# EAGLE board superslowclock_2x2_array (EAGLE 5.11)
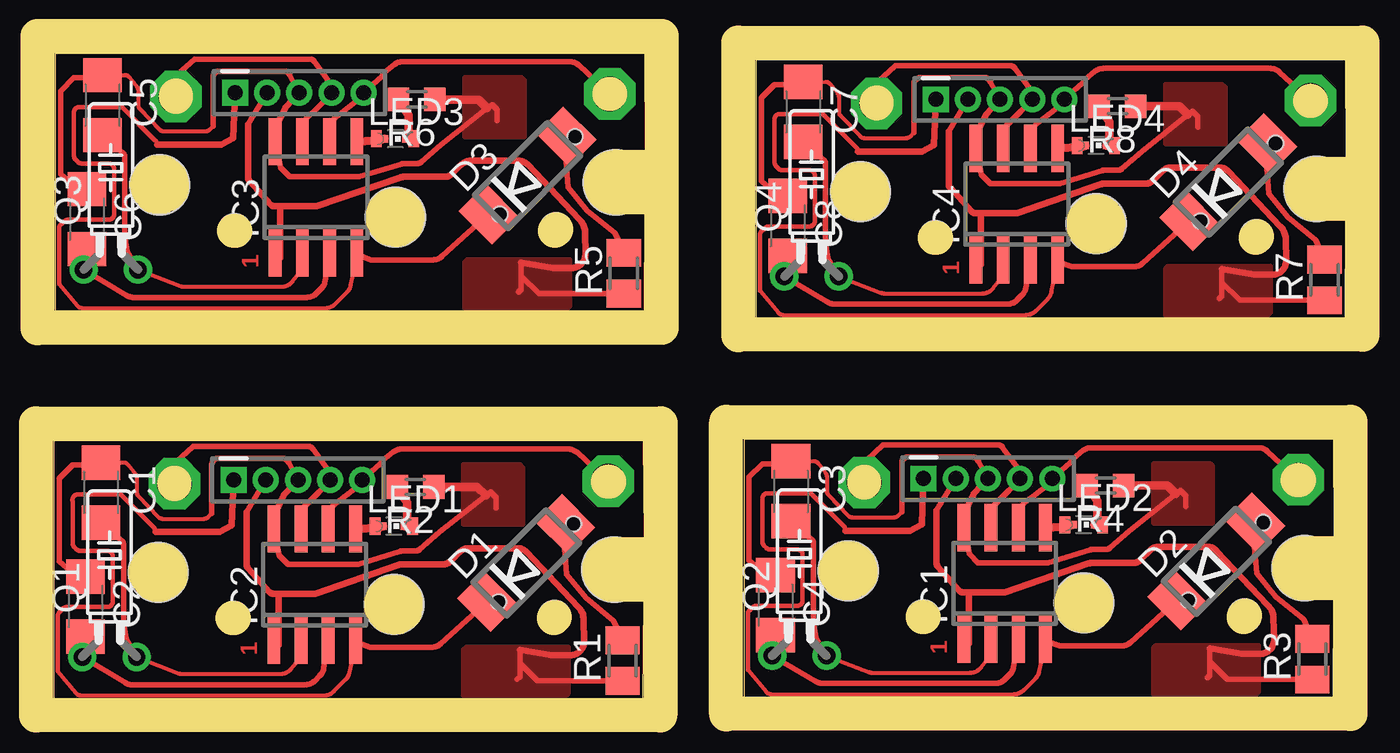
[diagram p0: board, top side]

Size 60.29 x 30.08 mm. Coordinates in mm from the lower left corner, seen from the top.
Outline: 0,0 27.5,0 27.53,4.54 arc-180 27.53,7.5 27.5,12 0,12 0,0
Outline: 32.19,0.06 59.69,0.06 59.72,4.6 arc-180 59.72,7.56 59.69,12.06 32.19,12.06 32.19,0.06
Outline: 0.06,18.08 27.56,18.08 27.59,22.62 arc-180 27.59,25.58 27.56,30.08 0.06,30.08 0.06,18.08
Outline: 32.76,17.77 60.26,17.77 60.29,22.3 arc-180 60.29,25.26 60.26,29.77 32.76,29.77 32.76,17.77
Copper layers (1*16): Top 0.035mm / dielectric 1.5mm / Bottom 0.035mm
Design rules "default *": minimum track width 10mil, minimum drill 0.5mm, track to track 9mil, track to pad 9mil, pad to pad 9mil, via to via 9mil, smd to smd 0mil, copper to edge 1mil, drill to drill 8mil, minimum pad ring 10mil, minimum via ring 8mil, stop-mask expansion 4mil, vias tented up to drill 0mil, thermal gap 10mil
Holes 1.5 mm at 8.38,3.75 23.37,3.79 40.57,3.81 55.56,3.86 8.44,21.83 23.43,21.87 41.13,21.52 56.13,21.56
Holes 2.75 mm at 4.88,5.88 15.88,4.38 37.07,5.94 48.07,4.44 4.94,23.96 15.94,22.46 37.63,23.64 48.63,22.14
Holes 3 mm at 26.16,6 58.35,6.06 26.22,24.08 58.92,23.77
Holes 0.7 mm at 20.75,4.5 24.25,8.12 52.94,4.56 56.44,8.19 20.81,22.58 24.31,26.21 53.51,22.27 57.01,25.89
Milling: 348 lines

## Footprints (pad centres in the part's own frame; a part is rotated, then mirrored left to right if it is on the bottom)
C1206 = smd 1.6 x 1.8: 1 -1.4,0; 2 1.4,0
DO214AA = smd 1.8 x 2.2: A 2.55,0; C -2.55,0
SO-08 = smd 0.6 x 2.2: 1 -1.905,-2.6; 2 -0.635,-2.6; 3 0.635,-2.6; 4 1.905,-2.6; 5 1.905,2.6; 6 0.635,2.6; 7 -0.635,2.6; 8 -1.905,2.6
CHIPLED-0603-TTW = smd 0.8 x 0.5: A 0,-0.875; C 0,0.875 | smd 0.35 x 0.35: A@1 0,-0.5; C@1 0,0.5
TC26H = drill 0.813 round: 1 -1.27,0; 2 1.27,0
M0805 = smd 1.3 x 1.6: 1 -0.95,0; 2 0.95,0
R0603 = smd 1 x 1.1: 1 -0.85,0; 2 0.85,0
PIC-ICSP-MINI = drill 0.7 square: 1 -3,0 | drill 0.7 round: 2 -1.5,0; 3 0,0; 4 1.5,0; 5 3,0

## Placement (x,y rotation side)
C1  [C1206]  2.21,9.59 270 top
C2  [C1206]  1.48,4.28 270 top
C3  [C1206]  34.4,9.66 270 top
C4  [C1206]  33.67,4.34 270 top
C5  [C1206]  2.27,27.67 270 top
C6  [C1206]  1.54,22.36 270 top
C7  [C1206]  34.97,27.36 270 top
C8  [C1206]  34.24,22.04 270 top
D1  [DO214AA]  22.05,6.32 45 top
D2  [DO214AA]  54.24,6.38 45 top
D3  [DO214AA]  22.11,24.4 45 top
D4  [DO214AA]  54.8,24.08 45 top
IC1  PIC12F629SN  [SO-08]  44.37,5.36 0 top
IC2  PIC12F629SN  [SO-08]  12.17,5.29 0 top
IC3  PIC12F629SN  [SO-08]  12.24,23.37 0 top
IC4  PIC12F629SN  [SO-08]  44.93,23.06 0 top
LED1  [CHIPLED-0603-TTW]  15.86,8.03 270 top
LED2  [CHIPLED-0603-TTW]  48.06,8.09 270 top
LED3  [CHIPLED-0603-TTW]  15.93,26.11 270 top
LED4  [CHIPLED-0603-TTW]  48.62,25.79 270 top
Q1  [TC26H]  2.6,1.92 0 top
Q2  [TC26H]  34.79,1.98 0 top
Q3  [TC26H]  2.66,20 0 top
Q4  [TC26H]  35.36,19.68 0 top
R1  [M0805]  26.53,1.75 90 top
R2  [R0603]  16.87,9.86 180 top
R3  [M0805]  58.73,1.82 90 top
R4  [R0603]  49.07,9.92 180 top
R5  [M0805]  26.6,19.84 90 top
R6  [R0603]  16.94,27.94 180 top
R7  [M0805]  59.29,19.52 90 top
R8  [R0603]  49.63,27.63 180 top
U$1  PIC-ICSP-MINI  [PIC-ICSP-MINI]  11.39,10.18 0 top
U$2  PIC-ICSP-MINI  [PIC-ICSP-MINI]  43.59,10.24 0 top
U$3  PIC-ICSP-MINI  [PIC-ICSP-MINI]  11.46,28.26 0 top
U$4  PIC-ICSP-MINI  [PIC-ICSP-MINI]  44.15,27.95 0 top

## Library data of the parts
C1-C8 = rcl
D1-D4 = diode
IC1-IC4 = microchip; MF: MICROCHIP; MPN: PIC12F629-I/SN; OC_FARNELL: 9759000; OC_NEWARK: 61K3433
LED1-LED4 = led
Q1-Q4 = crystal; OC_FARNELL: unknown; OC_NEWARK: unknown
R1-R8 = resistor
U$1-U$4 = SparkFun

## Nets
+5V: IC2.1 R1.1 U$1.2
+5V1: IC1.1 R3.1 U$2.2
+5V2: IC3.1 R5.1 U$3.2
+5V3: IC4.1 R7.1 U$4.2
GND: C1.1 C2.1 IC2.8 R2.1 U$1.3
GND1: C3.1 C4.1 IC1.8 R4.1 U$2.3
GND2: C5.1 C6.1 IC3.8 R6.1 U$3.3
GND3: C7.1 C8.1 IC4.8 R8.1 U$4.3
N$1: IC2.7 U$1.4
N$2: IC2.6 U$1.5
N$3: D1.C IC2.4 U$1.1
N$4: C1.2 IC2.2 Q1.2
N$5: C2.2 IC2.3 Q1.1
N$7: D1.A R1.2
N$9: IC2.5 LED1.A@1
N$10: LED1.C@1 R2.2
N$11: IC1.7 U$2.4
N$12: IC1.6 U$2.5
N$13: D2.C IC1.4 U$2.1
N$14: C3.2 IC1.2 Q2.2
N$15: C4.2 IC1.3 Q2.1
N$16: D2.A R3.2
N$19: IC1.5 LED2.A@1
N$20: LED2.C@1 R4.2
N$21: IC3.7 U$3.4
N$22: IC3.6 U$3.5
N$23: D3.C IC3.4 U$3.1
N$24: C5.2 IC3.2 Q3.2
N$25: C6.2 IC3.3 Q3.1
N$26: D3.A R5.2
N$29: IC3.5 LED3.A@1
N$30: LED3.C@1 R6.2
N$31: IC4.7 U$4.4
N$32: IC4.6 U$4.5
N$33: D4.C IC4.4 U$4.1
N$34: C7.2 IC4.2 Q4.2
N$35: C8.2 IC4.3 Q4.1
N$36: D4.A R7.2
N$39: IC4.5 LED4.A@1
N$40: LED4.C@1 R8.2

## Tracks (layer width: path | path; a pad name or v marks a point on that pad's centre or on a via)
+5V
  Top 0.254: 10.5,2.46 IC2.1 | 9,8.7 U$1.2 | 21.75,2.25 21.75,1.62 | 21.75,1.62 21.75,1 21.62,0.88 | R1.1 22.57,0.81 21.75,1.62
  Top 0.305: 10.5,4.88 10.5,2.46 | 10.5,4.88 10.24,4.88 arc-48 10.05,4.96 9.06,6.05 arc-42 9,6.22 9,8.7 | 10.5,4.88 12.19,4.88 16.09,6.21 arc-19 16.23,6.25 18.24,6.25 arc45 18.56,6.44 18.94,6.81 arc-45 19.39,7 21.61,7 arc-45 22.06,6.81 24.45,4.27 arc-45 24.72,3.68 24.75,2.62 24.73,2.51 arc-79 24.1,2 23.25,2 21.75,2.25
  pour Top: 19.25,2.38 24,2.38 24,0.25 23.88,0.12 19.12,0.12 19.12,2.25
+5V1
  Top 0.254: 42.69,2.52 IC1.1 | 41.19,8.76 U$2.2 | 53.94,2.31 53.94,1.69 | 53.94,1.69 53.94,1.06 53.82,0.94 | R3.1 54.76,0.87 53.94,1.69
  Top 0.305: 42.69,2.52 42.69,4.94 | 42.69,4.94 42.43,4.94 arc-48 42.24,5.02 41.26,6.12 arc-42 41.19,6.29 41.19,8.76 | 42.69,4.94 44.38,4.94 48.28,6.28 arc-19 48.42,6.31 50.43,6.31 arc45 50.75,6.5 51.13,6.88 arc-45 51.58,7.06 53.8,7.06 arc-45 54.25,6.88 56.65,4.33 arc-45 56.91,3.75 56.94,2.69 56.92,2.57 arc-79 56.3,2.06 55.44,2.06 53.94,2.31
  pour Top: 51.44,2.44 56.19,2.44 56.19,0.31 56.07,0.19 51.32,0.19 51.32,2.31
+5V2
  Top 0.254: IC3.1 10.56,20.54 | 9.06,26.78 U$3.2 | 21.81,20.33 21.81,19.71 | 21.81,19.71 21.81,19.08 21.69,18.96 | R5.1 22.63,18.89 21.81,19.71
  Top 0.305: 10.56,20.54 10.56,22.96 | 10.56,22.96 10.3,22.96 arc-48 10.11,23.04 9.13,24.13 arc-42 9.06,24.3 9.06,26.78 | 10.56,22.96 12.25,22.96 16.15,24.3 arc-19 16.3,24.33 18.3,24.33 arc45 18.62,24.52 19,24.89 arc-45 19.45,25.08 21.68,25.08 arc-45 22.12,24.89 24.52,22.35 arc-45 24.78,21.76 24.81,20.71 24.79,20.59 arc-79 24.17,20.08 23.31,20.08 21.81,20.33
  pour Top: 19.31,20.46 24.06,20.46 24.06,18.33 23.94,18.21 19.19,18.21 19.19,20.33
+5V3
  Top 0.254: IC4.1 43.26,20.23 | 41.76,26.46 U$4.2 | 54.51,20.02 54.51,19.39 | 54.51,19.39 54.51,18.77 54.38,18.64 | R7.1 55.33,18.57 54.51,19.39
  Top 0.305: 43.26,20.23 43.26,22.64 | 43.26,22.64 43,22.64 arc-48 42.81,22.73 41.83,23.82 arc-42 41.76,23.99 41.76,26.46 | 43.26,22.64 44.95,22.64 48.85,23.98 arc-19 48.99,24.02 51,24.02 arc45 51.32,24.2 51.7,24.58 arc-45 52.15,24.77 54.37,24.77 arc-45 54.82,24.58 57.21,22.04 arc-45 57.48,21.45 57.51,20.39 57.49,20.28 arc-79 56.86,19.77 56.01,19.77 54.51,20.02
  pour Top: 52.01,20.14 56.76,20.14 56.76,18.02 56.63,17.89 51.88,17.89 51.88,20.02
GND
  Top 0.178: C1.1 3.25,11 arc-53 3.45,10.9 3.82,10.45 arc-39 3.88,10.29 3.88,9.6 arc44 3.94,9.43 4.87,8.45 arc46 5.06,8.38 7.02,8.38 arc45 7.2,8.45 7.38,8.62
  Top 0.254: C2.1 1.1,5.64 0.25,6.38 0.25,10.25 0.88,10.88 1.95,10.88 C1.1 | 10.39,8.77 IC2.8 10.52,6.67 10.93,6.25 14.19,6.25 16.17,6.85 arc-16 16.21,6.88 16.91,6.88 arc41 17.07,6.94 18,7.75 20.16,9.46 20.38,9.62 20.62,9.38 20.62,8.88 | U$1.3 10.95,10.99 arc61 10.72,11.19 7.62,11.19 arc90 7.38,10.88 7.38,8.62
  Top 0.305: U$1.3 10.75,9.5 10.39,8.77
  Top 0.406: R2.1 19.76,9.86 20.16,9.46
  pour Top: 19.12,8.12 19.12,10.88 21.75,10.88 21.88,10.75 21.88,8.12
GND1
  Top 0.178: C3.1 35.45,11.06 arc-53 35.65,10.97 36.01,10.51 arc-39 36.07,10.35 36.07,9.66 arc44 36.14,9.49 37.06,8.52 arc46 37.25,8.44 39.21,8.44 arc45 39.39,8.51 39.57,8.69
  Top 0.254: C4.1 33.3,5.71 32.44,6.44 32.44,10.31 33.07,10.94 34.14,10.94 C3.1 | 42.59,8.83 IC1.8 42.71,6.73 43.12,6.31 46.38,6.31 48.36,6.92 arc-16 48.41,6.94 49.1,6.94 arc41 49.27,7 50.19,7.81 52.35,9.52 52.57,9.69 52.82,9.44 52.82,8.94 | U$2.3 43.14,11.06 arc61 42.92,11.25 39.82,11.25 arc90 39.57,10.94 39.57,8.69
  Top 0.305: U$2.3 42.94,9.56 42.59,8.83
  Top 0.406: R4.1 51.95,9.92 52.35,9.52
  pour Top: 51.32,8.19 51.32,10.94 53.94,10.94 54.07,10.81 54.07,8.19
GND2
  Top 0.178: C5.1 3.31,29.08 arc-53 3.52,28.98 3.88,28.53 arc-39 3.94,28.37 3.94,27.68 arc44 4.01,27.51 4.93,26.54 arc46 5.12,26.46 7.08,26.46 arc45 7.26,26.53 7.44,26.71
  Top 0.254: C6.1 1.17,23.73 0.31,24.46 0.31,28.33 0.94,28.96 2.01,28.96 C5.1 | 10.46,26.85 IC3.8 10.58,24.75 10.99,24.33 14.25,24.33 16.23,24.93 arc-16 16.27,24.96 16.97,24.96 arc41 17.14,25.02 18.06,25.83 20.23,27.54 20.44,27.71 20.69,27.46 20.69,26.96 | U$3.3 11.01,29.07 arc61 10.79,29.27 7.69,29.27 arc90 7.44,28.96 7.44,26.71
  Top 0.305: U$3.3 10.81,27.58 10.46,26.85
  Top 0.406: R6.1 19.82,27.94 20.23,27.54
  pour Top: 19.19,26.21 19.19,28.96 21.81,28.96 21.94,28.83 21.94,26.21
GND3
  Top 0.178: C7.1 36.01,28.77 arc-53 36.21,28.67 36.58,28.21 arc-39 36.63,28.05 36.63,27.37 arc44 36.7,27.19 37.63,26.22 arc46 37.82,26.14 39.78,26.14 arc45 39.96,26.21 40.13,26.39
  Top 0.254: C8.1 33.87,23.41 33.01,24.14 33.01,28.02 33.63,28.64 34.71,28.64 C7.1 | 43.15,26.53 IC4.8 43.28,24.44 43.69,24.02 46.95,24.02 48.93,24.62 arc-16 48.97,24.64 49.66,24.64 arc41 49.83,24.7 50.76,25.52 52.92,27.22 53.13,27.39 53.38,27.14 53.38,26.64 | U$4.3 43.71,28.76 arc61 43.48,28.95 40.38,28.95 arc90 40.13,28.64 40.13,26.39
  Top 0.305: U$4.3 43.51,27.27 43.15,26.53
  Top 0.406: R8.1 52.52,27.62 52.92,27.22
  pour Top: 51.88,25.89 51.88,28.64 54.51,28.64 54.63,28.52 54.63,25.89
N$1
  Top 0.254: IC2.7 11.39,8.54 11.62,8.88 12.38,9.62 U$1.4 13.02,10.36 12.08,11.65 arc54 11.87,11.75 6.5,11.75 5.72,11.03 arc-45 5.49,10
N$2
  Top 0.254: 26,10 24.43,11.46 arc43 24,11.62 16.22,11.62 arc39 15.83,11.49 15.38,11.12 15.25,10.95 U$1.5 14.25,9.94 13.12,9.06 12.75,8.73 12.89,7.98 IC2.6
N$3
  Top 0.178: 0.19,1.25 1.05,0.22 arc52 1.25,0.12 12.61,0.12 arc45 13.06,0.31 13.62,0.87 arc32 13.79,1.18 14.12,2.65
  Top 0.2: 4.75,7.75 4.75,7.77 arc45 4.68,7.95 3.12,9.5 1.07,9.5 arc90 0.88,9.18 0.88,7.23 arc45 0.95,7.05 1.05,6.95 arc45 1.23,6.88 2.5,6.88 arc-90 2.75,6.62 2.75,4.5 arc-90 2.5,4.25 0.6,4.25 arc45 0.43,4.18 0.32,4.07 arc45 0.19,3.9 0.19,1.25 | 14.12,2.65 IC2.4
  Top 0.254: D1.C 19.27,3.64 18.06,2.54 arc-42 17.63,2.38 14.75,2.38 14.39,2.5 IC2.4
  Top 0.305: U$1.1 8.3,8.05 7.75,7.75 4.75,7.75
N$4
  Top 0.178: Q1.2 5.87,1.14 arc21 5.96,1.12 10.57,1.12 arc51 11.07,1.36 11.41,1.79
  Top 0.254: Q1.2 3.37,2.76 3.25,3.5 3.25,7.16 arc49 3.16,7.35 C1.2 | 11.41,1.79 IC2.2
N$5
  Top 0.254: C2.2 1.23,2.69 Q1.1 3.35,0.71 arc31 3.67,0.62 11.74,0.62 arc45 12.19,0.81 12.41,1.04 arc36 12.59,1.38 IC2.3
N$6  (via drill 1.6)
  other vias: 5.62,10
N$7
  Top 0.254: D1.A 23.96,7.83 23.81,7.28 23.93,5.77 24.82,4.67 26.12,3.61 R1.2
N$8  (via drill 1.6)
  other vias: 25.88,10.12
N$9
  Top 0.406: IC2.5 15.17,7.96 LED1.A@1
N$10
  Top 0.406: LED1.C@1 16.5,8.22 16.5,9.14 R2.2
N$11
  Top 0.254: IC1.7 43.59,8.6 43.82,8.94 44.57,9.69 U$2.4 45.21,10.42 44.27,11.71 arc54 44.06,11.81 38.69,11.81 37.91,11.1 arc-45 37.69,10.06
N$12
  Top 0.254: 58.19,10.06 56.63,11.52 arc43 56.19,11.69 48.42,11.69 arc39 48.02,11.55 47.57,11.19 47.44,11.01 U$2.5 46.44,10 45.32,9.12 44.94,8.79 45.09,8.04 IC1.6
N$13
  Top 0.178: 32.38,1.31 33.24,0.29 arc52 33.44,0.19 44.8,0.19 arc45 45.25,0.37 45.81,0.93 arc32 45.98,1.24 46.32,2.71
  Top 0.2: 36.94,7.81 36.94,7.83 arc45 36.87,8.01 35.32,9.56 33.26,9.56 arc90 33.07,9.24 33.07,7.29 arc45 33.14,7.11 33.24,7.01 arc45 33.42,6.94 34.69,6.94 arc-90 34.94,6.68 34.94,4.57 arc-90 34.69,4.31 32.8,4.31 arc45 32.62,4.24 32.52,4.14 arc45 32.38,3.96 32.38,1.31 | 46.32,2.71 IC1.4
  Top 0.254: D2.C 51.46,3.7 50.25,2.6 arc-42 49.82,2.44 46.94,2.44 46.59,2.56 IC1.4
  Top 0.305: U$2.1 40.5,8.12 39.94,7.81 36.94,7.81
N$14
  Top 0.178: Q2.2 38.06,1.21 arc21 38.15,1.19 42.77,1.19 arc51 43.26,1.42 43.6,1.85
  Top 0.254: Q2.2 35.56,2.82 35.44,3.56 35.44,7.22 arc49 35.36,7.41 C3.2 | 43.6,1.85 IC1.2
N$15
  Top 0.254: C4.2 33.42,2.76 Q2.1 35.54,0.78 arc31 35.86,0.69 43.93,0.69 arc45 44.38,0.87 44.61,1.1 arc36 44.78,1.45 IC1.3
N$16
  Top 0.254: D2.A 56.15,7.89 56,7.34 56.12,5.83 57.02,4.74 58.32,3.67 R3.2
N$17  (via drill 1.6)
  other vias: 37.82,10.06
N$18  (via drill 1.6)
  other vias: 58.07,10.19
N$19
  Top 0.406: IC1.5 47.37,8.02 LED2.A@1
N$20
  Top 0.406: LED2.C@1 48.69,8.28 48.69,9.2 R4.2
N$21
  Top 0.254: IC3.7 11.46,26.62 11.69,26.96 12.44,27.71 U$3.4 13.08,28.44 12.14,29.73 arc54 11.93,29.83 6.56,29.83 5.78,29.11 arc-45 5.56,28.08
N$22
  Top 0.254: 26.06,28.08 24.5,29.54 arc43 24.06,29.71 16.29,29.71 arc39 15.89,29.57 15.44,29.21 15.31,29.03 U$3.5 14.31,28.02 13.19,27.14 12.81,26.81 12.96,26.06 IC3.6
N$23
  Top 0.178: 0.25,19.33 1.11,18.3 arc52 1.31,18.21 12.68,18.21 arc45 13.12,18.39 13.68,18.95 arc32 13.85,19.26 14.19,20.73
  Top 0.2: 4.81,25.83 4.81,25.85 arc45 4.74,26.03 3.19,27.58 1.13,27.58 arc90 0.94,27.26 0.94,25.31 arc45 1.01,25.13 1.11,25.03 arc45 1.29,24.96 2.56,24.96 arc-90 2.81,24.7 2.81,22.59 arc-90 2.56,22.33 0.67,22.33 arc45 0.49,22.26 0.39,22.16 arc45 0.25,21.98 0.25,19.33 | 14.19,20.73 IC3.4
  Top 0.254: D3.C 19.33,21.72 18.12,20.62 arc-42 17.69,20.46 14.81,20.46 14.46,20.58 IC3.4
  Top 0.305: U$3.1 8.37,26.14 7.81,25.83 4.81,25.83
N$24
  Top 0.178: Q3.2 5.93,19.22 arc21 6.02,19.21 10.64,19.21 arc51 11.13,19.44 11.48,19.87
  Top 0.254: Q3.2 3.43,20.84 3.31,21.58 3.31,25.24 arc49 3.23,25.43 C5.2 | 11.48,19.87 IC3.2
N$25
  Top 0.254: C6.2 1.29,20.78 Q3.1 3.41,18.8 arc31 3.73,18.71 11.8,18.71 arc45 12.25,18.89 12.48,19.12 arc36 12.65,19.46 IC3.3
N$26
  Top 0.254: D3.A 24.02,25.91 23.87,25.36 23.99,23.85 24.89,22.76 26.19,21.69 R5.2
N$27  (via drill 1.6)
  other vias: 5.69,28.08
N$28  (via drill 1.6)
  other vias: 25.94,28.21
N$29
  Top 0.406: IC3.5 15.24,26.04 LED3.A@1
N$30
  Top 0.406: LED3.C@1 16.56,26.3 16.56,27.22 R6.2
N$31
  Top 0.254: IC4.7 44.15,26.3 44.38,26.64 45.13,27.39 U$4.4 45.78,28.12 44.84,29.41 arc54 44.63,29.52 39.26,29.52 38.48,28.8 arc-45 38.25,27.77
N$32
  Top 0.254: 58.76,27.77 57.19,29.22 arc43 56.76,29.39 48.98,29.39 arc39 48.59,29.25 48.13,28.89 48.01,28.71 U$4.5 47.01,27.7 45.88,26.83 45.51,26.49 45.65,25.74 IC4.6
N$33
  Top 0.178: 32.95,19.02 33.81,17.99 arc52 34.01,17.89 45.37,17.89 arc45 45.82,18.08 46.38,18.64 arc32 46.55,18.95 46.88,20.41
  Top 0.2: 37.51,25.52 37.51,25.54 arc45 37.44,25.71 35.88,27.27 33.83,27.27 arc90 33.63,26.95 33.63,25 arc45 33.71,24.82 33.81,24.71 arc45 33.99,24.64 35.26,24.64 arc-90 35.51,24.39 35.51,22.27 arc-90 35.26,22.02 33.37,22.02 arc45 33.19,21.94 33.08,21.84 arc45 32.95,21.66 32.95,19.02 | 46.88,20.41 IC4.4
  Top 0.254: D4.C 52.02,21.41 50.82,20.31 arc-42 50.39,20.14 47.51,20.14 47.16,20.27 IC4.4
  Top 0.305: U$4.1 41.06,25.82 40.51,25.52 37.51,25.52
N$34
  Top 0.178: Q4.2 38.63,18.91 arc21 38.72,18.89 43.33,18.89 arc51 43.83,19.13 44.17,19.55
  Top 0.254: Q4.2 36.13,20.52 36.01,21.27 36.01,24.92 arc49 35.92,25.11 C7.2 | 44.17,19.55 IC4.2
N$35
  Top 0.254: C8.2 33.99,20.46 Q4.1 36.1,18.48 arc31 36.43,18.39 44.5,18.39 arc45 44.95,18.58 45.17,18.8 arc36 45.35,19.15 IC4.3
N$36
  Top 0.254: D4.A 56.72,25.6 56.57,25.05 56.69,23.54 57.59,22.44 58.88,21.38 R7.2
N$37  (via drill 1.6)
  other vias: 38.38,27.77
N$38  (via drill 1.6)
  other vias: 58.63,27.89
N$39
  Top 0.406: IC4.5 47.93,25.72 LED4.A@1
N$40
  Top 0.406: LED4.C@1 49.26,25.98 49.26,26.9 R8.2

## Text on the board
Top: 1 | 1 | 1 | 1